# EAGLE board H-bridge (EAGLE 8.0.1)
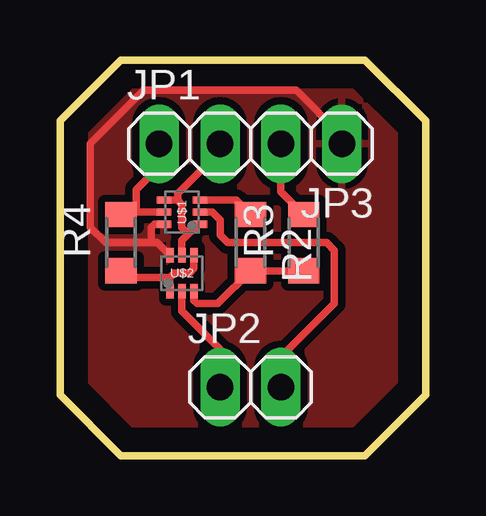
[diagram p0: board, top side]

Size 15.24 x 16.51 mm. Coordinates in mm from the lower left corner, seen from the top.
Outline: 12.7,0 2.54,0 0,2.54 0,13.97 2.54,16.51 12.7,16.51 15.24,13.97 15.24,2.54 12.7,0
Copper layers (1*16): Top 0.035mm / dielectric 1.5mm / Bottom 0.035mm
Design rules "default": minimum track width 10mil, minimum drill 24mil, track to track 8mil, track to pad 8mil, pad to pad 8mil, via to via 8mil, smd to smd 8mil, copper to edge 40mil, drill to drill 8mil, minimum pad ring 10mil, minimum via ring 8mil, stop-mask expansion 4mil, vias tented up to drill 0mil, thermal gap 10mil

## Footprints (pad centres in the part's own frame; a part is rotated, then mirrored left to right if it is on the bottom)
1X02 = drill 1.1 long: 1 -1.27,0; 2 1.27,0
R0805 = smd 1.05 x 1.3: 1 -1.175,0; 2 1.175,0
SOT-563 = smd 0.3 x 0.6: 1 -0.5,-0.75; 2 0,-0.75; 3 0.5,-0.75; 4 0.5,0.75; 5 0,0.75; 6 -0.5,0.75

## Placement (x,y rotation side)
JP1  [1X02]  5.4,13.02 0 top
JP2  [1X02]  7.94,2.86 0 top
JP3  [1X02]  10.48,13.02 180 top
R2  0  [R0805]  7.94,8.89 270 top
R3  0  [R0805]  10.16,8.89 90 top
R4  0  [R0805]  2.54,8.89 90 top
U$1  FET-N/PNTZD3155C  [SOT-563]  5.08,10.16 90 top
U$2  FET-N/PNTZD3155C  [SOT-563]  5.08,7.62 0 top

## Library data of the parts
JP1-JP3 = pinhead
R2-R4 U$1 U$2 = Namenlos

## Nets
GND: JP3.1 U$1.6 U$2.6
N$5: R4.1 U$2.1 U$2.4
N$7: JP1.2 U$1.1 U$1.4 U$2.5
N$8: JP2.1 U$2.2
N$9: R2.1 U$1.3
N$10: R2.2 R3.1 U$2.3
N$11: JP1.1 R4.2 U$1.5
N$12: JP2.2 U$1.2
VCC: JP3.2 R3.2

## Tracks (layer width: path | path; a pad name or v marks a point on that pad's centre or on a via)
GND
  Top 0.305: 3.81,8.89 1.91,8.89 1.27,9.53 1.27,13.02 3.49,15.24 9.84,15.24 11.75,13.33 JP3.1 | 3.81,8.89 4.06,8.89 U$2.6 | U$1.6 3.94,9.66 3.81,9.53 3.81,8.89
  pour Top (isolate 0.305): 0,2.54 0,13.97 2.54,16.51 12.7,16.51 15.24,13.97 15.24,2.54 12.7,0 2.54,0
N$5
  Top 0.305: U$2.1 4.58,7.44 | 4.58,7.44 4.76,7.62 5.4,7.62 5.58,7.8 U$2.4 | 4.58,7.44 2.82,7.44 R4.1
N$7
  Top 0.305: U$2.5 5.08,8.98 5.35,9.26 | 5.35,9.26 U$1.1 | U$1.4 4.9,10.66 | 4.9,10.66 5.08,10.48 5.08,9.53 5.35,9.26 | 6.67,12.7 JP1.2 6.67,12.7 | 4.9,10.66 4.9,10.93 6.67,12.7
N$8
  Top 0.305: U$2.2 5.08,6.03 6.67,4.45 JP2.1
N$9
  Top 0.305: U$1.3 7.34,10.66 R2.1
N$10
  Top 0.305: U$2.3 5.58,6.48 5.71,6.35 6.57,6.35 R2.2 R3.1
N$11
  Top 0.305: 3.17,10.16 U$1.5 | 3.17,10.16 2.63,10.16 R4.2 | JP1.1 4.13,12.06 3.17,11.11 3.17,10.16
N$12
  Top 0.305: U$1.2 6.35,10.16 6.67,9.84 6.67,9.21 6.98,8.89 11.11,8.89 11.43,8.57 11.43,6.35 9.21,4.13 JP2.2
VCC
  Top 0.305: JP3.2 9.21,11.02 R3.2